# EAGLE board brain1_v10 (EAGLE 9.6.2)
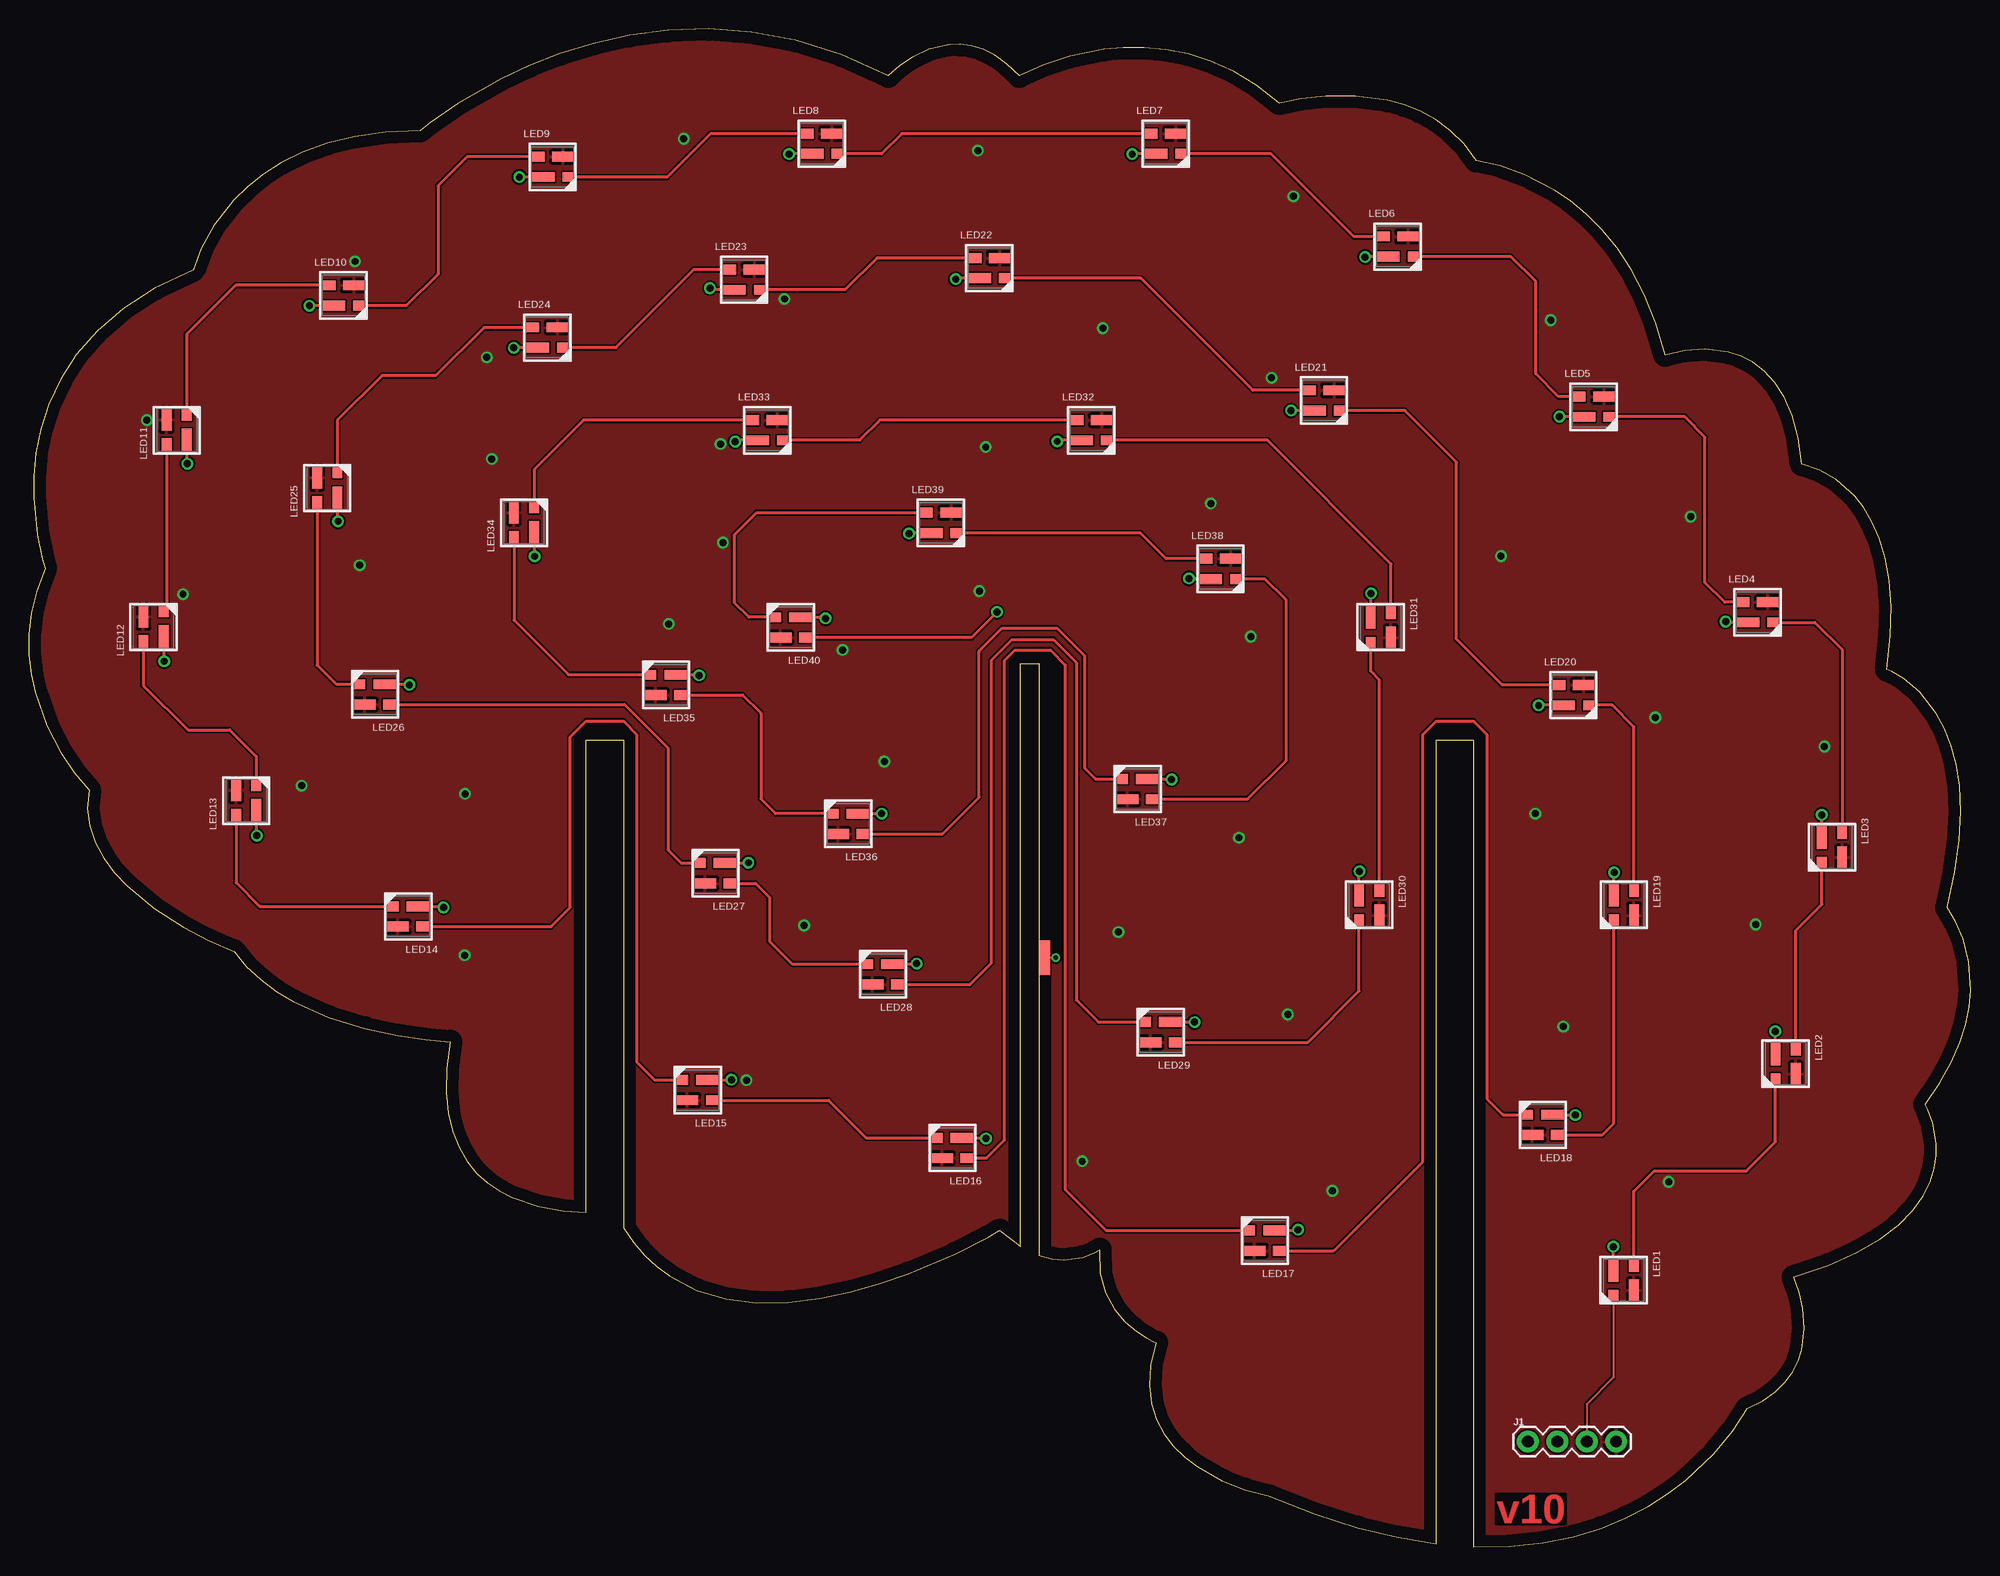
[diagram p0: board, top side]
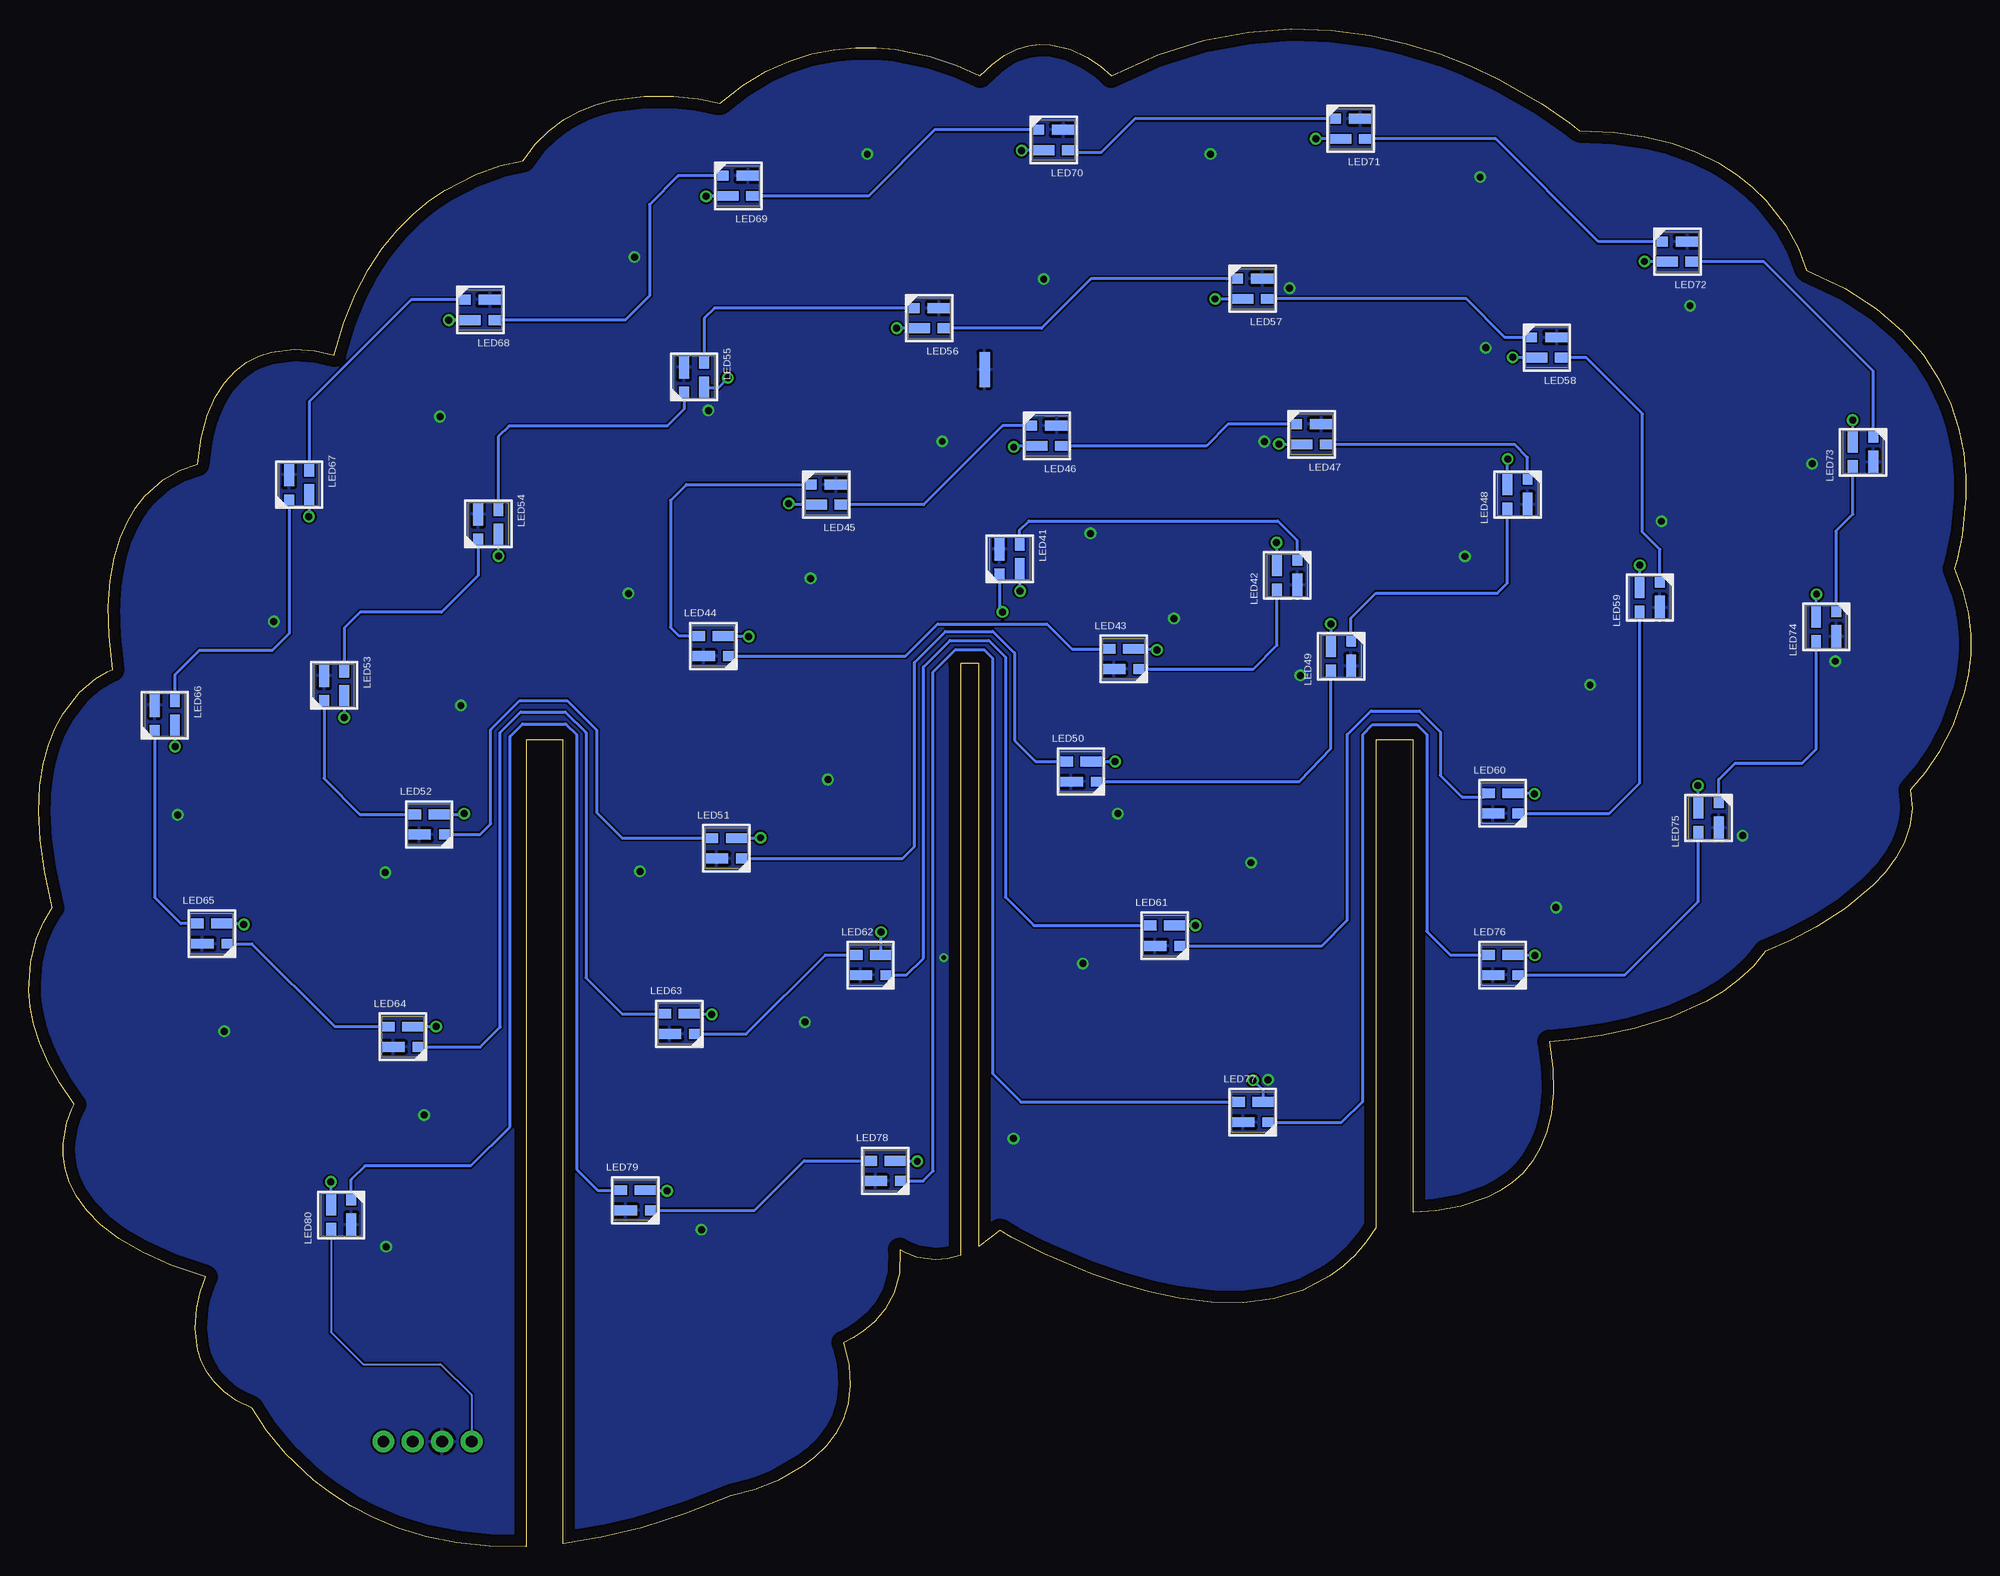
[diagram p1: board, bottom side, seen from below]

Size 167.71 x 131.1 mm. Coordinates in mm from the lower left corner, seen from the top.
Outline: 165.68,55.2 166.36,58.27 166.74,61.04 166.86,63.5 166.76,65.69 166.46,67.61 166,69.29 165.43,70.73 164.76,71.95 163.3,73.8 161.92,74.97 160.88,75.59 160.48,75.76 160.78,78.65 160.84,81.21 160.68,83.45 160.33,85.41 159.82,87.1 159.2,88.54 158.48,89.74 157.7,90.74 156.09,92.18 154.63,93.01 153.15,93.49 152.82,95.78 152.3,97.69 151.62,99.28 150.8,100.55 149.88,101.55 148.89,102.3 147.85,102.83 146.8,103.18 144.76,103.44 143.01,103.33 141.33,102.94 140.52,105.7 139.54,108.14 138.42,110.28 137.19,112.15 135.87,113.75 134.51,115.11 133.13,116.25 131.76,117.18 129.18,118.53 127.04,119.3 125.02,119.72 123.97,121.14 122.8,122.31 121.52,123.25 120.17,123.99 118.77,124.54 117.35,124.93 114.56,125.31 112.02,125.3 109.93,125.08 108,124.69 106.04,126.23 104.05,127.44 102.07,128.33 100.11,128.95 98.19,129.32 96.33,129.49 94.55,129.48 92.88,129.33 89.91,128.73 87.6,127.98 85.55,127.05 84.49,128.06 83.43,128.82 82.4,129.33 81.38,129.64 80.4,129.77 79.47,129.75 77.75,129.36 76.3,128.67 75.18,127.92 74.2,127.05 70.17,128.87 66.22,130.11 62.4,130.83 58.72,131.1 55.19,130.98 51.86,130.54 48.73,129.84 45.84,128.94 43.2,127.91 40.84,126.81 37.04,124.66 34.63,122.99 33.79,122.32 30.8,122.19 28.13,121.81 25.74,121.21 23.64,120.44 21.8,119.53 20.21,118.51 18.84,117.42 17.69,116.3 15.95,114.08 14.87,112.15 14.17,110.27 10.87,108.69 8.12,106.92 5.88,105 4.1,102.95 2.73,100.84 1.72,98.69 1.03,96.55 0.61,94.46 0.41,92.47 0.4,90.6 0.71,87.44 1.17,85.29 1.41,84.51 0.67,82.54 0.21,80.63 0,78.79 0,77.03 0.19,75.35 0.53,73.77 1.52,70.95 2.74,68.61 3.93,66.86 5.19,65.36 5.06,63.76 5.25,62.25 5.73,60.83 6.45,59.49 7.36,58.25 8.42,57.11 10.83,55.11 13.31,53.52 15.52,52.37 17.71,51.42 18.78,50.12 20.01,48.98 21.37,47.98 22.83,47.11 25.91,45.73 29,44.77 31.85,44.15 34.2,43.8 36.39,43.62 36.08,41.32 36.03,39.27 36.2,37.45 36.58,35.86 37.14,34.47 37.85,33.28 38.69,32.26 39.64,31.41 40.67,30.71 41.75,30.15 44,29.38 46.19,28.98 48.12,28.85 48.12,69.66 51.35,69.66 51.35,27.55 52.23,26.28 53.19,25.16 54.22,24.2 55.32,23.38 57.67,22.15 60.2,21.4 62.85,21.08 65.57,21.11 68.29,21.44 70.96,22 73.52,22.73 75.93,23.57 80.03,25.31 82.82,26.72 83.85,27.31 85.63,25.94 85.63,76.28 87.26,76.28 87.26,25.16 88.38,24.86 89.39,24.77 91.04,24.99 92.1,25.42 92.47,25.65 92.5,23.61 92.97,21.9 93.74,20.51 94.68,19.42 95.65,18.6 96.51,18.04 97.37,17.62 96.89,15.68 96.77,13.93 96.95,12.36 97.39,10.96 98.04,9.73 98.88,8.65 99.84,7.72 100.88,6.92 103.06,5.7 105.05,4.92 107.06,4.38 111.03,2.83 114.76,1.64 118.27,0.79 121.56,0.26 121.56,69.66 124.78,69.66 124.78,0 127.91,0.03 130.78,0.33 133.41,0.87 135.8,1.6 137.95,2.49 139.89,3.5 141.6,4.6 143.11,5.74 145.52,8 147.17,9.99 148.42,11.94 149.75,12.62 150.83,13.38 151.69,14.22 152.34,15.11 152.81,16.04 153.12,16.99 153.35,18.86 153.22,20.57 152.91,21.98 152.44,23.29 155.41,24.31 157.88,25.42 159.89,26.59 161.49,27.81 162.72,29.05 163.61,30.29 164.22,31.51 164.58,32.68 164.74,33.8 164.74,34.84 164.44,36.58 164,37.75 163.78,38.18 165.05,40.05 166.04,41.83 166.77,43.52 167.27,45.13 167.57,46.63 167.71,48.03 167.57,50.5 167.07,52.49 166.44,53.97 165.68,55.2
Copper layers (1*16): Top 0.035mm / dielectric 1.5mm / Bottom 0.035mm
Design rules "default": minimum track width 6mil, minimum drill 0.35mm, track to track 6mil, track to pad 6mil, pad to pad 6mil, via to via 6mil, smd to smd 6mil, copper to edge 40mil, drill to drill 6mil, minimum pad ring 10mil, minimum via ring 8mil, stop-mask expansion 4mil, vias tented up to drill 0mil, thermal gap 10mil
tKeepout: area 48.1,69.6 to 51.4,130.5; area 121.7,69.6 to 124.9,130.5; area 85.6,76.3 to 87.4,129.7
bKeepout: area 121.6,69.7 to 124.8,124.3; area 85.6,76.3 to 87.2,130.4; area 48.1,69.7 to 51.4,131.8

## Footprints (pad centres in the part's own frame; a part is rotated, then mirrored left to right if it is on the bottom)
1X04 = drill 1.016 pad 1.88: 1 0,0; 2 2.54,0; 3 5.08,0; 4 7.62,0
1X01_SOLDER_PADS = smd 3 x 0.9: 1 0,0
3.5X3.5_RGB_LED = smd 1.15 x 0.85: 1 -1.275,0.875 | smd 2 x 0.85: 2 -0.85,-0.875 | smd 1 x 0.85: 3 1.35,-0.875 | smd 1.9 x 0.85: 4 0.9,0.875

## Placement (x,y rotation side)
FRAME1  FRAME-LEDGER  [CREATIVE_COMMONS]  155.98,-32.31 0 bottom  (outside the outline)
FRAME2  FRAME-LEDGER  [CREATIVE_COMMONS]  -80.23,-22.56 0 top  (outside the outline)
FRAME3  FRAME-LEDGER  [CREATIVE_COMMONS]  155.98,-41.2 0 bottom  (outside the outline)
J1  [1X04]  129.48,9.08 0 top
J2  [1X01_SOLDER_PADS]  87.73,50.88 90 top
J3  [1X01_SOLDER_PADS]  85.16,101.68 90 bottom
LED1  3.5X3.5_RGB_LED3.5X3.5  [3.5X3.5_RGB_LED]  137.74,23.03 270 top
LED2  3.5X3.5_RGB_LED3.5X3.5  [3.5X3.5_RGB_LED]  151.74,41.73 270 top
LED3  3.5X3.5_RGB_LED3.5X3.5  [3.5X3.5_RGB_LED]  155.74,60.43 270 top
LED4  3.5X3.5_RGB_LED3.5X3.5  [3.5X3.5_RGB_LED]  149.32,80.72 0 top
LED5  3.5X3.5_RGB_LED3.5X3.5  [3.5X3.5_RGB_LED]  135.16,98.47 0 top
LED6  3.5X3.5_RGB_LED3.5X3.5  [3.5X3.5_RGB_LED]  118.24,112.3 0 top
LED7  3.5X3.5_RGB_LED3.5X3.5  [3.5X3.5_RGB_LED]  98.18,121.19 0 top
LED8  3.5X3.5_RGB_LED3.5X3.5  [3.5X3.5_RGB_LED]  68.48,121.19 0 top
LED9  3.5X3.5_RGB_LED3.5X3.5  [3.5X3.5_RGB_LED]  45.24,119.19 0 top
LED10  3.5X3.5_RGB_LED3.5X3.5  [3.5X3.5_RGB_LED]  27.18,108.08 0 top
LED11  3.5X3.5_RGB_LED3.5X3.5  [3.5X3.5_RGB_LED]  12.77,96.44 90 top
LED12  3.5X3.5_RGB_LED3.5X3.5  [3.5X3.5_RGB_LED]  10.77,79.44 90 top
LED13  3.5X3.5_RGB_LED3.5X3.5  [3.5X3.5_RGB_LED]  18.77,64.44 90 top
LED14  3.5X3.5_RGB_LED3.5X3.5  [3.5X3.5_RGB_LED]  32.77,54.44 180 top
LED15  3.5X3.5_RGB_LED3.5X3.5  [3.5X3.5_RGB_LED]  57.77,39.44 180 top
LED16  3.5X3.5_RGB_LED3.5X3.5  [3.5X3.5_RGB_LED]  79.77,34.44 180 top
LED17  3.5X3.5_RGB_LED3.5X3.5  [3.5X3.5_RGB_LED]  106.77,26.44 180 top
LED18  3.5X3.5_RGB_LED3.5X3.5  [3.5X3.5_RGB_LED]  130.77,36.44 180 top
LED19  3.5X3.5_RGB_LED3.5X3.5  [3.5X3.5_RGB_LED]  137.77,55.44 270 top
LED20  3.5X3.5_RGB_LED3.5X3.5  [3.5X3.5_RGB_LED]  133.4,73.56 0 top
LED21  3.5X3.5_RGB_LED3.5X3.5  [3.5X3.5_RGB_LED]  111.86,99.01 0 top
LED22  3.5X3.5_RGB_LED3.5X3.5  [3.5X3.5_RGB_LED]  82.96,110.44 0 top
LED23  3.5X3.5_RGB_LED3.5X3.5  [3.5X3.5_RGB_LED]  61.77,109.44 0 top
LED24  3.5X3.5_RGB_LED3.5X3.5  [3.5X3.5_RGB_LED]  44.77,104.44 0 top
LED25  3.5X3.5_RGB_LED3.5X3.5  [3.5X3.5_RGB_LED]  25.77,91.44 90 top
LED26  3.5X3.5_RGB_LED3.5X3.5  [3.5X3.5_RGB_LED]  29.91,73.62 180 top
LED27  3.5X3.5_RGB_LED3.5X3.5  [3.5X3.5_RGB_LED]  59.31,58.17 180 top
LED28  3.5X3.5_RGB_LED3.5X3.5  [3.5X3.5_RGB_LED]  73.77,49.44 180 top
LED29  3.5X3.5_RGB_LED3.5X3.5  [3.5X3.5_RGB_LED]  97.77,44.44 180 top
LED30  3.5X3.5_RGB_LED3.5X3.5  [3.5X3.5_RGB_LED]  115.77,55.44 270 top
LED31  3.5X3.5_RGB_LED3.5X3.5  [3.5X3.5_RGB_LED]  116.77,79.44 270 top
LED32  3.5X3.5_RGB_LED3.5X3.5  [3.5X3.5_RGB_LED]  91.77,96.44 0 top
LED33  3.5X3.5_RGB_LED3.5X3.5  [3.5X3.5_RGB_LED]  63.77,96.44 0 top
LED34  3.5X3.5_RGB_LED3.5X3.5  [3.5X3.5_RGB_LED]  42.77,88.44 90 top
LED35  3.5X3.5_RGB_LED3.5X3.5  [3.5X3.5_RGB_LED]  55.04,74.44 180 top
LED36  3.5X3.5_RGB_LED3.5X3.5  [3.5X3.5_RGB_LED]  70.77,62.44 180 top
LED37  3.5X3.5_RGB_LED3.5X3.5  [3.5X3.5_RGB_LED]  95.77,65.44 180 top
LED38  3.5X3.5_RGB_LED3.5X3.5  [3.5X3.5_RGB_LED]  102.92,84.47 0 top
LED39  3.5X3.5_RGB_LED3.5X3.5  [3.5X3.5_RGB_LED]  78.77,88.44 0 top
LED40  3.5X3.5_RGB_LED3.5X3.5  [3.5X3.5_RGB_LED]  65.82,79.41 180 top
LED41  3.5X3.5_RGB_LED3.5X3.5  [3.5X3.5_RGB_LED]  83,85.34 270 bottom
LED42  3.5X3.5_RGB_LED3.5X3.5  [3.5X3.5_RGB_LED]  59.02,83.89 90 bottom
LED43  3.5X3.5_RGB_LED3.5X3.5  [3.5X3.5_RGB_LED]  73.15,76.68 0 bottom
LED44  3.5X3.5_RGB_LED3.5X3.5  [3.5X3.5_RGB_LED]  108.6,77.8 0 bottom
LED45  3.5X3.5_RGB_LED3.5X3.5  [3.5X3.5_RGB_LED]  98.83,90.88 180 bottom
LED46  3.5X3.5_RGB_LED3.5X3.5  [3.5X3.5_RGB_LED]  79.78,95.96 180 bottom
LED47  3.5X3.5_RGB_LED3.5X3.5  [3.5X3.5_RGB_LED]  56.92,96.08 180 bottom
LED48  3.5X3.5_RGB_LED3.5X3.5  [3.5X3.5_RGB_LED]  39.14,90.88 90 bottom
LED49  3.5X3.5_RGB_LED3.5X3.5  [3.5X3.5_RGB_LED]  54.38,76.91 90 bottom
LED50  3.5X3.5_RGB_LED3.5X3.5  [3.5X3.5_RGB_LED]  76.83,66.95 0 bottom
LED51  3.5X3.5_RGB_LED3.5X3.5  [3.5X3.5_RGB_LED]  107.46,60.32 0 bottom
LED52  3.5X3.5_RGB_LED3.5X3.5  [3.5X3.5_RGB_LED]  133.14,62.38 0 bottom
LED53  3.5X3.5_RGB_LED3.5X3.5  [3.5X3.5_RGB_LED]  141.35,74.39 270 bottom
LED54  3.5X3.5_RGB_LED3.5X3.5  [3.5X3.5_RGB_LED]  128.04,88.34 270 bottom
LED55  3.5X3.5_RGB_LED3.5X3.5  [3.5X3.5_RGB_LED]  110.26,101.04 270 bottom
LED56  3.5X3.5_RGB_LED3.5X3.5  [3.5X3.5_RGB_LED]  89.94,106.12 180 bottom
LED57  3.5X3.5_RGB_LED3.5X3.5  [3.5X3.5_RGB_LED]  62,108.66 180 bottom
LED58  3.5X3.5_RGB_LED3.5X3.5  [3.5X3.5_RGB_LED]  36.6,103.58 180 bottom
LED59  3.5X3.5_RGB_LED3.5X3.5  [3.5X3.5_RGB_LED]  27.71,81.99 90 bottom
LED60  3.5X3.5_RGB_LED3.5X3.5  [3.5X3.5_RGB_LED]  40.41,64.21 0 bottom
LED61  3.5X3.5_RGB_LED3.5X3.5  [3.5X3.5_RGB_LED]  69.62,52.78 0 bottom
LED62  3.5X3.5_RGB_LED3.5X3.5  [3.5X3.5_RGB_LED]  95.02,50.24 0 bottom
LED63  3.5X3.5_RGB_LED3.5X3.5  [3.5X3.5_RGB_LED]  111.53,45.16 0 bottom
LED64  3.5X3.5_RGB_LED3.5X3.5  [3.5X3.5_RGB_LED]  135.4,44.04 0 bottom
LED65  3.5X3.5_RGB_LED3.5X3.5  [3.5X3.5_RGB_LED]  151.91,52.95 0 bottom
LED66  3.5X3.5_RGB_LED3.5X3.5  [3.5X3.5_RGB_LED]  155.98,71.83 270 bottom
LED67  3.5X3.5_RGB_LED3.5X3.5  [3.5X3.5_RGB_LED]  144.37,91.74 270 bottom
LED68  3.5X3.5_RGB_LED3.5X3.5  [3.5X3.5_RGB_LED]  128.72,106.83 180 bottom
LED69  3.5X3.5_RGB_LED3.5X3.5  [3.5X3.5_RGB_LED]  106.45,117.55 180 bottom
LED70  3.5X3.5_RGB_LED3.5X3.5  [3.5X3.5_RGB_LED]  79.19,121.51 180 bottom
LED71  3.5X3.5_RGB_LED3.5X3.5  [3.5X3.5_RGB_LED]  53.54,122.47 180 bottom
LED72  3.5X3.5_RGB_LED3.5X3.5  [3.5X3.5_RGB_LED]  25.32,111.86 180 bottom
LED73  3.5X3.5_RGB_LED3.5X3.5  [3.5X3.5_RGB_LED]  9.29,94.53 90 bottom
LED74  3.5X3.5_RGB_LED3.5X3.5  [3.5X3.5_RGB_LED]  12.47,79.45 90 bottom
LED75  3.5X3.5_RGB_LED3.5X3.5  [3.5X3.5_RGB_LED]  22.63,62.94 90 bottom
LED76  3.5X3.5_RGB_LED3.5X3.5  [3.5X3.5_RGB_LED]  40.41,50.24 0 bottom
LED77  3.5X3.5_RGB_LED3.5X3.5  [3.5X3.5_RGB_LED]  62,37.54 0 bottom
LED78  3.5X3.5_RGB_LED3.5X3.5  [3.5X3.5_RGB_LED]  93.75,32.46 0 bottom
LED79  3.5X3.5_RGB_LED3.5X3.5  [3.5X3.5_RGB_LED]  115.34,29.92 0 bottom
LED80  3.5X3.5_RGB_LED3.5X3.5  [3.5X3.5_RGB_LED]  140.74,28.65 90 bottom

## Library data of the parts
FRAME1-FRAME3 = SparkFun-Aesthetics
J1 = SparkFun-Connectors; PROD_ID: CONN-09696
J2 J3 = SparkFun-Connectors
LED1-LED80 = brain

## Nets
5V: J1.4 LED1.4 LED2.4 LED3.4 LED4.4 LED5.4 LED6.4 LED7.4 LED8.4 LED9.4 LED10.4 LED11.4 LED12.4 LED13.4 LED14.4 LED15.4 LED16.4 LED17.4 LED18.4 LED19.4 LED20.4 LED21.4 LED22.4 LED23.4 LED24.4 LED25.4 LED26.4 LED27.4 LED28.4 LED29.4 LED30.4 LED31.4 LED32.4 LED33.4 LED34.4 LED35.4 LED36.4 LED37.4 LED38.4 LED39.4 LED40.4 LED41.4 LED42.4 LED43.4 LED44.4 LED45.4 LED46.4 LED47.4 LED48.4 LED49.4 LED50.4 LED51.4 LED52.4 LED53.4 LED54.4 LED55.4 LED56.4 LED57.4 LED58.4 LED59.4 LED60.4 LED61.4 LED62.4 LED63.4 LED64.4 LED65.4 LED66.4 LED67.4 LED68.4 LED69.4 LED70.4 LED71.4 LED72.4 LED73.4 LED74.4 LED75.4 LED76.4 LED77.4 LED78.4 LED79.4 LED80.4
DI: J1.3 LED1.3
DO: J1.1 LED80.1
DO_1: LED40.1 LED41.3
GND: J1.2 J2.1 J3.1 LED1.2 LED2.2 LED3.2 LED4.2 LED5.2 LED6.2 LED7.2 LED8.2 LED9.2 LED10.2 LED11.2 LED12.2 LED13.2 LED14.2 LED15.2 LED16.2 LED17.2 LED18.2 LED19.2 LED20.2 LED21.2 LED22.2 LED23.2 LED24.2 LED25.2 LED26.2 LED27.2 LED28.2 LED29.2 LED30.2 LED31.2 LED32.2 LED33.2 LED34.2 LED35.2 LED36.2 LED37.2 LED38.2 LED39.2 LED40.2 LED41.2 LED42.2 LED43.2 LED44.2 LED45.2 LED46.2 LED47.2 LED48.2 LED49.2 LED50.2 LED51.2 LED52.2 LED53.2 LED54.2 LED55.2 LED56.2 LED57.2 LED58.2 LED59.2 LED60.2 LED61.2 LED62.2 LED63.2 LED64.2 LED65.2 LED66.2 LED67.2 LED68.2 LED69.2 LED70.2 LED71.2 LED72.2 LED73.2 LED74.2 LED75.2 LED76.2 LED77.2 LED78.2 LED79.2 LED80.2
N$1: LED1.1 LED2.3
N$2: LED2.1 LED3.3
N$3: LED3.1 LED4.3
N$4: LED4.1 LED5.3
N$5: LED6.1 LED7.3
N$6: LED7.1 LED8.3
N$7: LED8.1 LED9.3
N$8: LED9.1 LED10.3
N$9: LED11.1 LED12.3
N$10: LED5.1 LED6.3
N$11: LED12.1 LED13.3
N$12: LED13.1 LED14.3
N$13: LED14.1 LED15.3
N$14: LED16.1 LED17.3
N$15: LED17.1 LED18.3
N$16: LED18.1 LED19.3
N$17: LED19.1 LED20.3
N$18: LED15.1 LED16.3
N$19: LED21.1 LED22.3
N$20: LED22.1 LED23.3
N$21: LED23.1 LED24.3
N$22: LED24.1 LED25.3
N$23: LED26.1 LED27.3
N$24: LED27.1 LED28.3
N$25: LED28.1 LED29.3
N$26: LED29.1 LED30.3
N$27: LED25.1 LED26.3
N$28: LED31.1 LED32.3
N$29: LED32.1 LED33.3
N$30: LED33.1 LED34.3
N$31: LED34.1 LED35.3
N$32: LED36.1 LED37.3
N$33: LED37.1 LED38.3
N$34: LED38.1 LED39.3
N$35: LED39.1 LED40.3
N$36: LED35.1 LED36.3
N$37: LED10.1 LED11.3
N$38: LED20.1 LED21.3
N$39: LED30.1 LED31.3
N$40: LED41.1 LED42.3
N$41: LED42.1 LED43.3
N$42: LED43.1 LED44.3
N$43: LED44.1 LED45.3
N$44: LED46.1 LED47.3
N$45: LED47.1 LED48.3
N$46: LED48.1 LED49.3
N$47: LED49.1 LED50.3
N$48: LED45.1 LED46.3
N$49: LED51.1 LED52.3
N$50: LED52.1 LED53.3
N$51: LED53.1 LED54.3
N$52: LED54.1 LED55.3
N$53: LED56.1 LED57.3
N$54: LED57.1 LED58.3
N$55: LED58.1 LED59.3
N$56: LED59.1 LED60.3
N$57: LED55.1 LED56.3
N$58: LED61.1 LED62.3
N$59: LED62.1 LED63.3
N$60: LED63.1 LED64.3
N$61: LED64.1 LED65.3
N$62: LED66.1 LED67.3
N$63: LED67.1 LED68.3
N$64: LED68.1 LED69.3
N$65: LED69.1 LED70.3
N$66: LED65.1 LED66.3
N$67: LED71.1 LED72.3
N$68: LED72.1 LED73.3
N$69: LED73.1 LED74.3
N$70: LED74.1 LED75.3
N$71: LED76.1 LED77.3
N$72: LED77.1 LED78.3
N$73: LED78.1 LED79.3
N$74: LED79.1 LED80.3
N$75: LED75.1 LED76.3
N$76: LED50.1 LED51.3
N$77: LED60.1 LED61.3
N$78: LED70.1 LED71.3

## Tracks (layer width: path | path; a pad name or v marks a point on that pad's centre or on a via)
5V  (via drill 0.6)
  Top 0.254: LED1.4 138.64,22.1 | LED13.4 17.82,65.4 | LED26.4 28.83,72.56 | LED31.4 117.7,78.48
  Bottom 0.254: LED80.4 141.61,31.49 v141.63,31.51 | LED79.4 112.65,30.79 v112.59,30.73 | LED78.4 91.01,33.33 v90.98,33.29 | LED77.4 61.1,39.41 v61.97,40.28 | LED76.4 37.67,51.11 v37.64,51.07 | LED75.4 23.5,65.69 v23.54,65.73 | LED74.4 13.34,82.23 v13.3,82.27 | LED73.4 10.17,97.29 v10.18,97.3 | LED72.4 28.13,110.98 v28.16,111.02 | LED71.4 v56.55,121.6 v56.56,121.61 | LED70.4 81.92,120.63 v81.96,120.59 | LED69.4 108.86,116.67 108.89,116.64 v109.22,116.64 | LED68.4 131.43,105.95 v131.44,105.94 | LED67.4 143.49,89.01 v143.53,88.97 | LED66.4 155.1,69.12 v155.09,69.11 | LED65.4 149.23,53.83 v149.14,53.74 | LED64.4 132.55,44.91 v132.53,44.93 | LED63.4 108.79,46.03 v108.73,45.97 | LED62.4 v94.12,53.07 v94.1,53.08 | LED61.4 v66.95,53.65 v66.94,53.66 | LED60.4 37.72,65.08 v37.66,65.02 | LED59.4 28.58,84.77 v28.57,84.78 | LED58.4 39.51,102.7 v39.54,102.74 | LED57.4 v65.25,107.78 | LED56.4 92.74,105.24 v92.75,105.25 | LED55.4 108.16,100.14 v107.33,100.96 | LED54.4 127.16,85.58 v127.15,85.57 | LED53.4 140.47,71.63 v140.48,71.62 | LED52.4 130.18,63.25 v130.12,63.32 | LED51.4 104.55,61.2 v104.52,61.23 | LED50.4 v73.89,67.82 v73.88,67.81 | v55.26,79.7 55.25,79.69 LED49.4 | LED48.4 40.01,93.91 v39.97,93.95 | LED47.4 59.7,95.21 v59.73,95.25 | LED46.4 82.56,95.08 v82.65,94.99 | LED45.4 101.96,90 v102.08,90.11 | LED44.4 105.59,78.67 v105.53,78.61 | LED43.4 70.36,77.55 v70.28,77.47 | LED42.4 59.9,86.7 v59.94,86.74 | LED41.4 82.13,82.58 v82.09,82.55
  pour Top: -0.23,-0.56 -0.23,131.52 168.68,131.52 168.68,-0.56
DI
  Top 0.152: LED1.3 136.86,14.61 134.56,12.31 J1.3
DO
  Bottom 0.152: LED80.1 141.61,18.52 138.86,15.77 132.15,15.77 129.48,13.09 J1.1
DO_1  (via drill 0.6)
  Top 0.254: v83.61,80.74 81.4,78.53 LED40.1
  Bottom 0.254: LED41.3 83.88,81.01 v83.61,80.74
GND  (via drill 0.35, 0.6)
  Top 0.152: J2.1 v88.69,50.88 v88.69,50.87
  Top 0.254: LED1.2 136.86,25.89 v136.85,25.9 | LED2.2 150.86,44.51 v150.84,44.52 | LED3.2 v154.86,63.21 v154.86,63.22 | LED4.2 146.61,79.84 v146.55,79.9 | LED5.2 132.22,97.59 v132.2,97.61 | LED6.2 115.43,111.42 v115.41,111.4 | LED7.2 95.32,120.31 v95.29,120.29 | LED8.2 65.67,120.31 v65.65,120.29 | LED9.2 v42.36,118.31 | LED10.2 24.24,107.2 v24.23,107.18 | LED11.2 13.64,93.59 v13.68,93.54 | LED12.2 11.64,76.51 v11.68,76.47 | LED13.2 19.64,61.45 v19.68,61.41 | LED14.2 35.71,55.31 v35.81,55.21 | LED15.2 60.66,40.31 v60.67,40.33 | LED16.2 82.61,35.31 v82.67,35.25 | LED17.2 109.56,27.31 v109.62,27.38 | LED18.2 133.54,37.31 v133.57,37.28 | LED19.2 136.89,58.2 v136.93,58.24 | LED20.2 130.41,72.68 v130.4,72.66 | LED21.2 v109.02,98.13 v109.01,98.14 | LED22.2 80.12,109.56 v80.05,109.49 | LED23.2 58.97,108.56 v58.82,108.71 | LED24.2 41.89,103.56 v41.88,103.55 | LED25.2 26.64,88.61 v26.69,88.57 | LED26.2 32.81,74.49 v32.86,74.44 | LED27.2 62.11,59.04 v62.15,59.08 | LED28.2 76.62,50.31 v76.68,50.36 | LED29.2 v100.68,45.31 | LED30.2 114.89,58.3 v114.93,58.34 | LED31.2 115.89,82.31 v115.92,82.34 | LED38.2 100.24,83.59 v100.2,83.64 | LED32.2 88.91,95.56 v88.82,95.47 | LED33.2 61.12,95.56 v61,95.45 | LED34.2 43.64,85.58 v43.68,85.54 | LED35.2 57.82,75.31 v57.88,75.26 | LED36.2 v73.65,63.31 v73.65,63.32 | LED37.2 98.65,66.31 v98.7,66.26 | LED39.2 76.05,87.56 v76.02,87.52 | LED40.2 68.7,80.28 v68.8,80.18
  pour Bottom: -0.23,-0.56 -0.23,131.44 168.77,131.44 168.77,-0.56
N$1
  Top 0.254: LED1.1 138.61,30.69 140.38,32.46 148.36,32.46 150.86,34.96 LED2.3
N$2
  Top 0.254: LED2.1 152.61,53.22 154.86,55.47 LED3.3
N$3
  Top 0.254: LED4.3 154.26,79.84 156.61,77.49 LED3.1
N$4
  Top 0.254: LED4.1 146.46,81.59 144.77,83.28 144.77,95.83 143.01,97.59 LED5.3
N$5
  Top 0.254: LED6.1 114.43,113.17 107.29,120.31 LED7.3
N$6
  Top 0.254: LED7.1 75.4,122.06 73.65,120.31 LED8.3
N$7
  Top 0.254: LED8.1 58.89,122.06 55.14,118.31 LED9.3
N$8
  Top 0.254: LED9.1 37.84,120.06 35.33,117.55 35.33,109.93 32.6,107.2 LED10.3
N$9
  Top 0.254: LED11.1 11.89,81.04 LED12.3
N$10
  Top 0.254: LED5.1 132.12,99.34 130.14,101.32 130.14,109.29 128.01,111.42 LED6.3
N$11
  Top 0.254: LED12.1 9.89,74.4 13.74,70.56 17.34,70.56 19.64,68.26 LED13.3
N$12
  Top 0.254: LED13.1 17.89,57.36 19.94,55.31 LED14.3
N$13
  Top 0.254: LED14.1 45.1,53.56 46.76,55.21 46.76,69.93 48.13,71.3 51.34,71.3 52.5,70.14 52.5,41.85 54.05,40.31 LED15.3
N$14
  Top 0.254: LED16.1 82.72,33.56 84.27,35.12 84.27,76.55 85.15,77.43 88.25,77.43 89.51,76.17 89.51,30.85 93.05,27.31 LED17.3
N$15
  Top 0.254: LED17.1 112.71,25.56 120.4,33.25 120.4,70.14 121.56,71.3 124.78,71.3 125.94,70.14 125.94,38.69 127.32,37.31 LED18.3
N$16
  Top 0.254: LED18.1 135.89,35.56 136.89,36.56 LED19.3
N$17
  Top 0.254: LED19.1 138.64,70.82 136.78,72.68 LED20.3
N$18
  Top 0.254: LED15.1 69.07,38.56 72.32,35.31 LED16.3
N$19
  Top 0.254: LED21.1 105.72,99.88 96.04,109.56 LED22.3
N$20
  Top 0.254: LED22.1 73.24,111.31 70.49,108.56 LED23.3
N$21
  Top 0.254: LED23.1 57.43,110.31 50.68,103.56 LED24.3
N$22
  Top 0.254: LED24.1 39.3,105.31 35.15,101.16 30.5,101.16 26.64,97.3 LED25.3
N$23
  Top 0.254: LED26.1 51.43,72.74 55.19,68.98 55.19,60.19 56.34,59.04 LED27.3
N$24
  Top 0.254: LED28.3 65.93,50.31 63.98,52.26 63.98,56.07 62.76,57.29 LED27.1
N$25
  Top 0.254: LED28.1 81.29,48.56 83.13,50.4 83.13,76.57 84.91,78.35 88.49,78.35 90.47,76.36 90.47,47.21 92.37,45.31 LED29.3
N$26
  Top 0.254: LED29.1 110.46,43.56 114.89,47.99 LED30.3
N$27
  Top 0.254: LED26.3 26.54,74.49 24.89,76.14 LED25.1
N$28
  Top 0.254: LED31.1 117.64,84.89 106.97,95.56 LED32.3
N$29
  Top 0.254: LED32.1 73.51,97.31 71.76,95.56 LED33.3
N$30
  Top 0.254: LED33.1 47.91,97.31 43.64,93.04 LED34.3
N$31
  Top 0.254: LED34.1 41.89,80.02 46.6,75.31 LED35.3
N$32
  Top 0.254: LED36.1 78.9,61.56 82.06,64.73 82.06,77.34 84.06,79.34 88.81,79.34 91.18,76.96 91.18,67.25 92.12,66.31 LED37.3
N$33
  Top 0.254: LED37.1 105.25,64.56 108.56,67.87 108.56,81.79 106.75,83.59 LED38.3
N$34
  Top 0.254: LED38.1 98.21,85.34 95.99,87.56 LED39.3
N$35
  Top 0.254: LED39.1 62.84,89.31 60.91,87.38 60.91,81.55 62.18,80.28 LED40.3
N$36
  Top 0.254: LED36.3 64.49,63.31 63.22,64.58 63.22,71.99 61.64,73.56 LED35.1
N$37
  Top 0.254: LED10.1 17.84,108.95 13.64,104.75 LED11.3
N$38
  Top 0.254: LED21.3 118.85,98.13 123.31,93.67 123.31,78.38 127.26,74.43 LED20.1
N$39
  Top 0.254: LED30.1 116.64,74.86 115.89,75.61 LED31.3
N$40
  Bottom 0.254: LED42.3 58.15,86.92 59.84,88.6 81.35,88.6 82.13,87.83 LED41.1
N$41
  Bottom 0.254: LED43.3 61.96,75.8 59.9,77.86 LED42.1
N$42
  Bottom 0.254: LED44.3 92,76.92 89.22,79.7 79.78,79.7 77.63,77.55 LED43.1
N$43
  Bottom 0.254: LED45.3 110.9,91.75 112.29,90.36 112.29,79.41 111.56,78.67 LED44.1
N$44
  Bottom 0.254: LED47.3 64.13,96.96 66.01,95.08 LED46.1
N$45
  Bottom 0.254: LED47.1 39.38,95.21 38.26,94.09 LED48.3
N$46
  Bottom 0.254: LED49.3 53.5,80.22 51.35,82.37 40.86,82.37 40.01,83.22 LED48.1
N$47
  Bottom 0.254: LED50.3 75.46,66.06 58,66.06 55.25,68.96 LED49.1
N$48
  Bottom 0.254: LED46.3 83.6,96.83 90.43,90 LED45.1
N$49
  Bottom 0.254: LED52.3 128.74,61.5 127.82,62.43 127.82,70.58 125.32,73.08 121.22,73.08 118.67,70.53 118.67,63.4 116.46,61.2 LED51.1
N$50
  Bottom 0.254: LED53.3 142.22,66.35 139.12,63.25 LED52.1
N$51
  Bottom 0.254: LED54.3 128.91,83.88 132.07,80.72 139.11,80.72 140.47,79.36 LED53.1
N$52
  Bottom 0.254: LED55.3 111.13,98.24 112.58,96.79 126.24,96.79 127.16,95.87 LED54.1
N$53
  Bottom 0.254: LED57.3 64.23,109.53 64.24,109.52 75.96,109.52 80.24,105.24 LED56.1
N$54
  Bottom 0.254: LED58.3 40.21,104.45 43.54,107.78 LED57.1
N$55
  Bottom 0.254: LED59.3 26.83,86.13 28.34,87.63 28.34,97.86 33.18,102.7 LED58.1
N$56
  Bottom 0.254: LED60.3 31.2,63.33 28.58,65.95 LED59.1
N$57
  Bottom 0.254: LED56.3 108.49,106.99 109.38,106.1 LED55.1
N$58
  Bottom 0.254: LED62.3 91.91,49.36 90.45,50.83 90.45,75.98 88.16,78.27 84.78,78.27 83.36,76.85 83.36,56.11 80.9,53.65 LED61.1
N$59
  Bottom 0.254: LED63.3 105.75,44.28 98.92,51.11 LED62.1
N$60
  Bottom 0.254: LED64.3 128.72,43.16 127,44.88 127,70.33 125.23,72.11 121.39,72.11 119.59,70.31 119.59,49.13 116.49,46.03 LED63.1
N$61
  Bottom 0.254: LED65.3 148.45,52.08 141.29,44.91 LED64.1
N$62
  Bottom 0.254: LED67.3 145.24,78.85 146.7,77.39 153,77.39 155.1,75.29 LED66.1
N$63
  Bottom 0.254: LED68.3 134.68,107.7 143.49,98.89 LED67.1
N$64
  Bottom 0.254: LED69.3 111.62,118.42 114.12,115.92 114.12,108.05 116.21,105.95 LED68.1
N$65
  Bottom 0.254: LED70.3 89.49,122.38 95.2,116.67 LED69.1
N$66
  Bottom 0.254: LED66.3 156.85,56.09 154.59,53.83 LED65.1
N$67
  Bottom 0.254: LED72.3 32.14,112.73 41,121.6 LED71.1
N$68
  Bottom 0.254: LED73.3 8.42,101.56 17.84,110.98 LED72.1
N$69
  Bottom 0.254: LED74.3 11.59,87.76 10.17,89.19 LED73.1
N$70
  Bottom 0.254: LED75.3 21.75,66.27 20.35,67.66 14.56,67.66 13.34,68.88 LED74.1
N$71
  Bottom 0.254: LED77.3 54.32,36.66 52.5,38.48 52.5,70.14 51.65,70.99 47.82,70.99 46.97,70.14 46.97,53.14 44.94,51.11 LED76.1
N$72
  Bottom 0.254: LED78.3 90.47,31.58 89.61,32.44 89.61,75.56 87.69,77.48 85.21,77.48 84.48,76.75 84.48,40.87 82.02,38.41 LED77.1
N$73
  Bottom 0.254: LED79.3 105.03,29.04 100.74,33.33 LED78.1
N$74
  Bottom 0.254: LED80.3 139.86,31.71 138.67,32.89 129.54,32.89 126.17,36.27 126.17,69.99 125.08,71.07 121.33,71.07 120.4,70.14 120.4,32.59 118.6,30.79 LED79.1
N$75
  Bottom 0.254: LED76.3 29.88,49.36 23.5,55.74 LED75.1
N$76
  Bottom 0.254: LED51.3 92.25,59.45 91.23,60.46 91.23,76.38 88.56,79.06 84.44,79.06 82.57,77.19 82.57,69.65 80.75,67.82 LED50.1
N$77
  Bottom 0.254: LED61.3 56.04,51.9 53.83,54.11 53.83,70.15 51.79,72.19 47.6,72.19 45.8,70.38 45.8,66.63 43.94,64.77 42,64.77 LED60.1
N$78
  Bottom 0.254: LED71.3 72.17,123.35 75.1,120.42 77.92,120.42 LED70.1

## Text on the board
Top: v10